# Altium PCB Chocolate_Vending_Machine_V1.0.PcbDoc
Units mm, origin at the board's own origin, x right, y up, seen from the top; angles counter-clockwise.
Board outline 80 x 72 mm, 2 copper layers (Top Layer, Bottom Layer); 17 components, 21 nets, 117 pads, 20 vias.
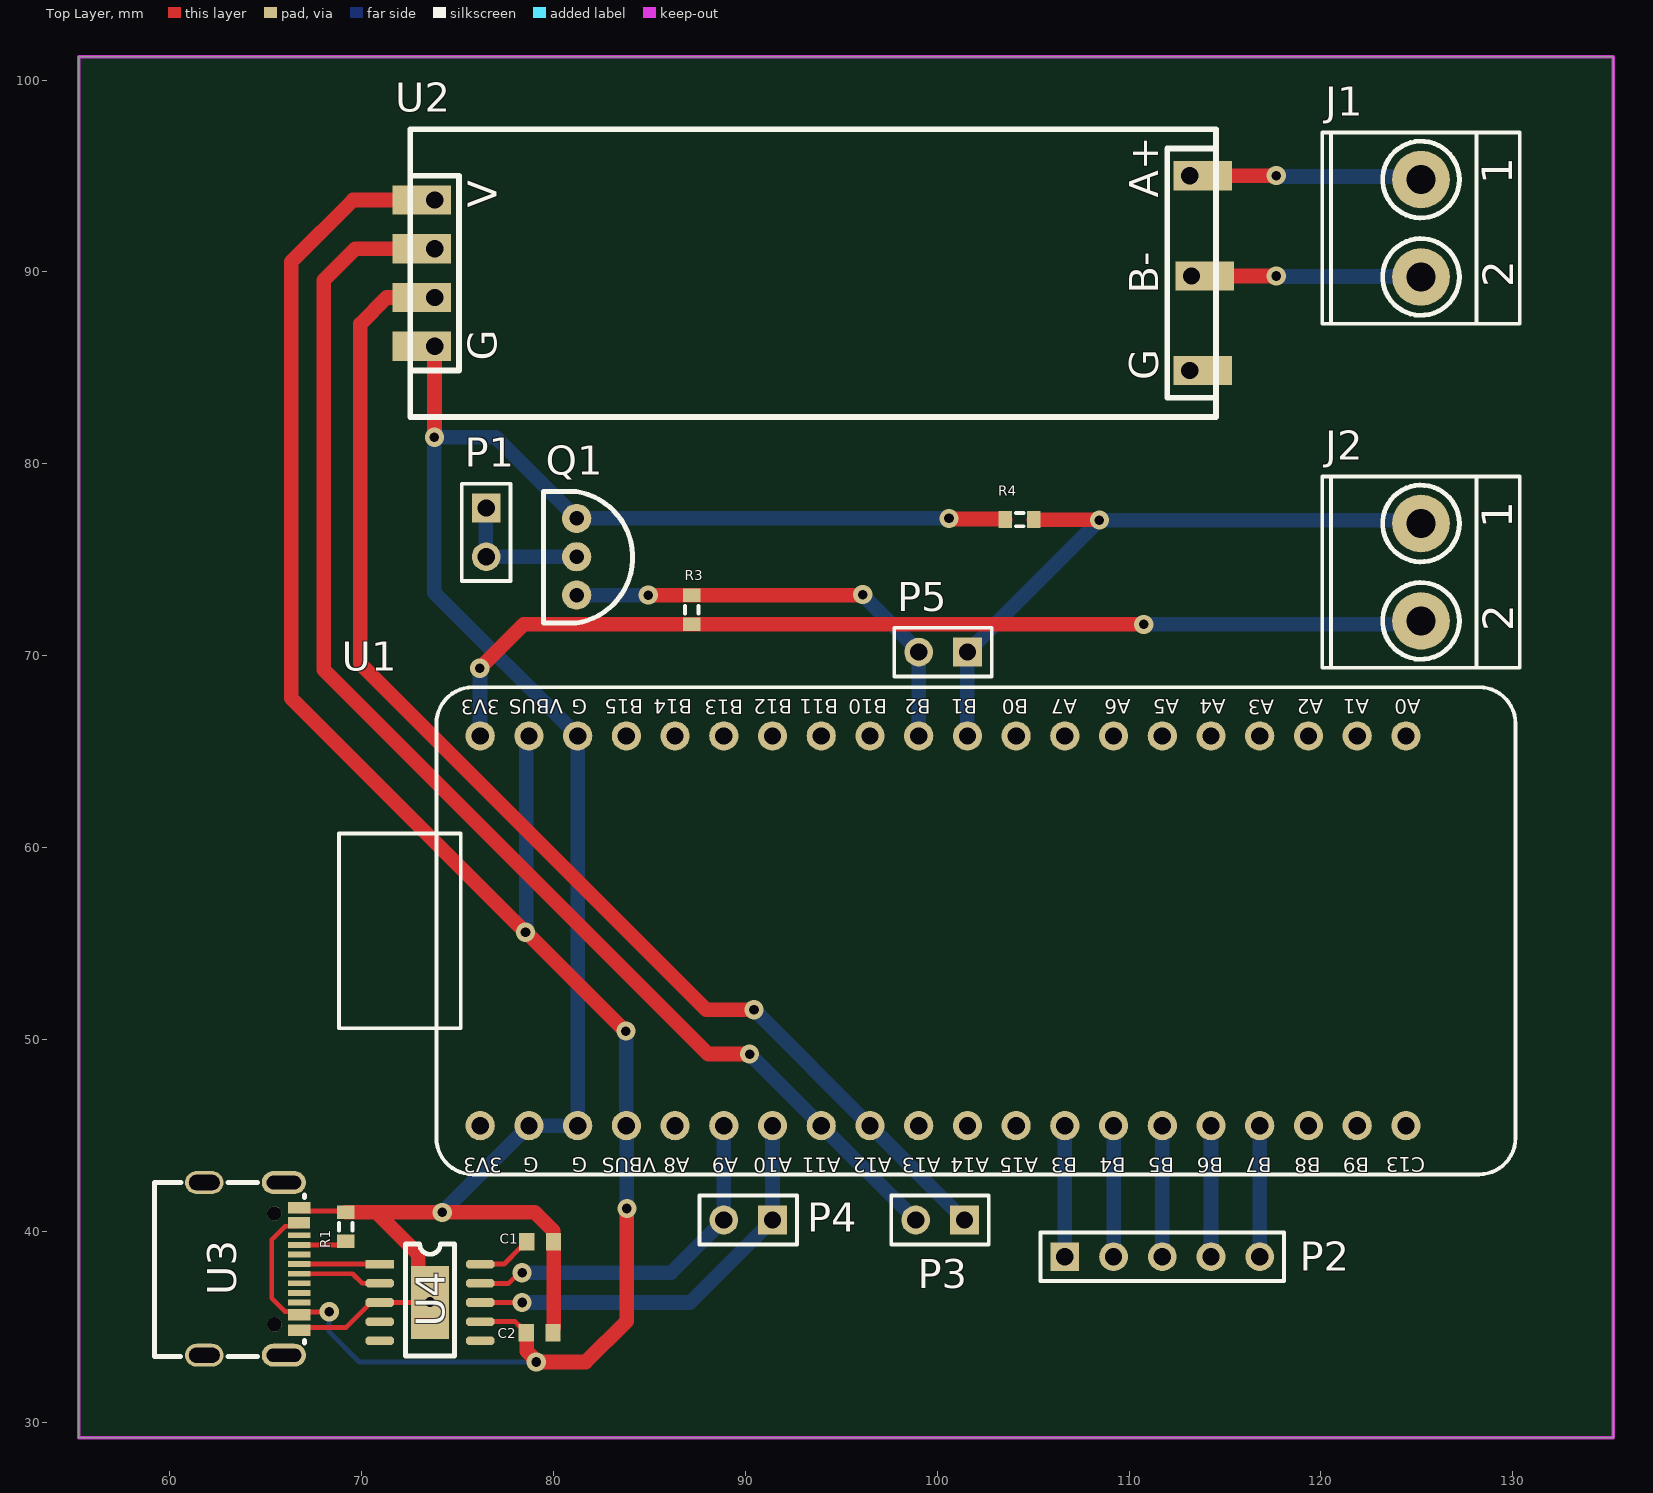
[diagram p0: Top Layer view]
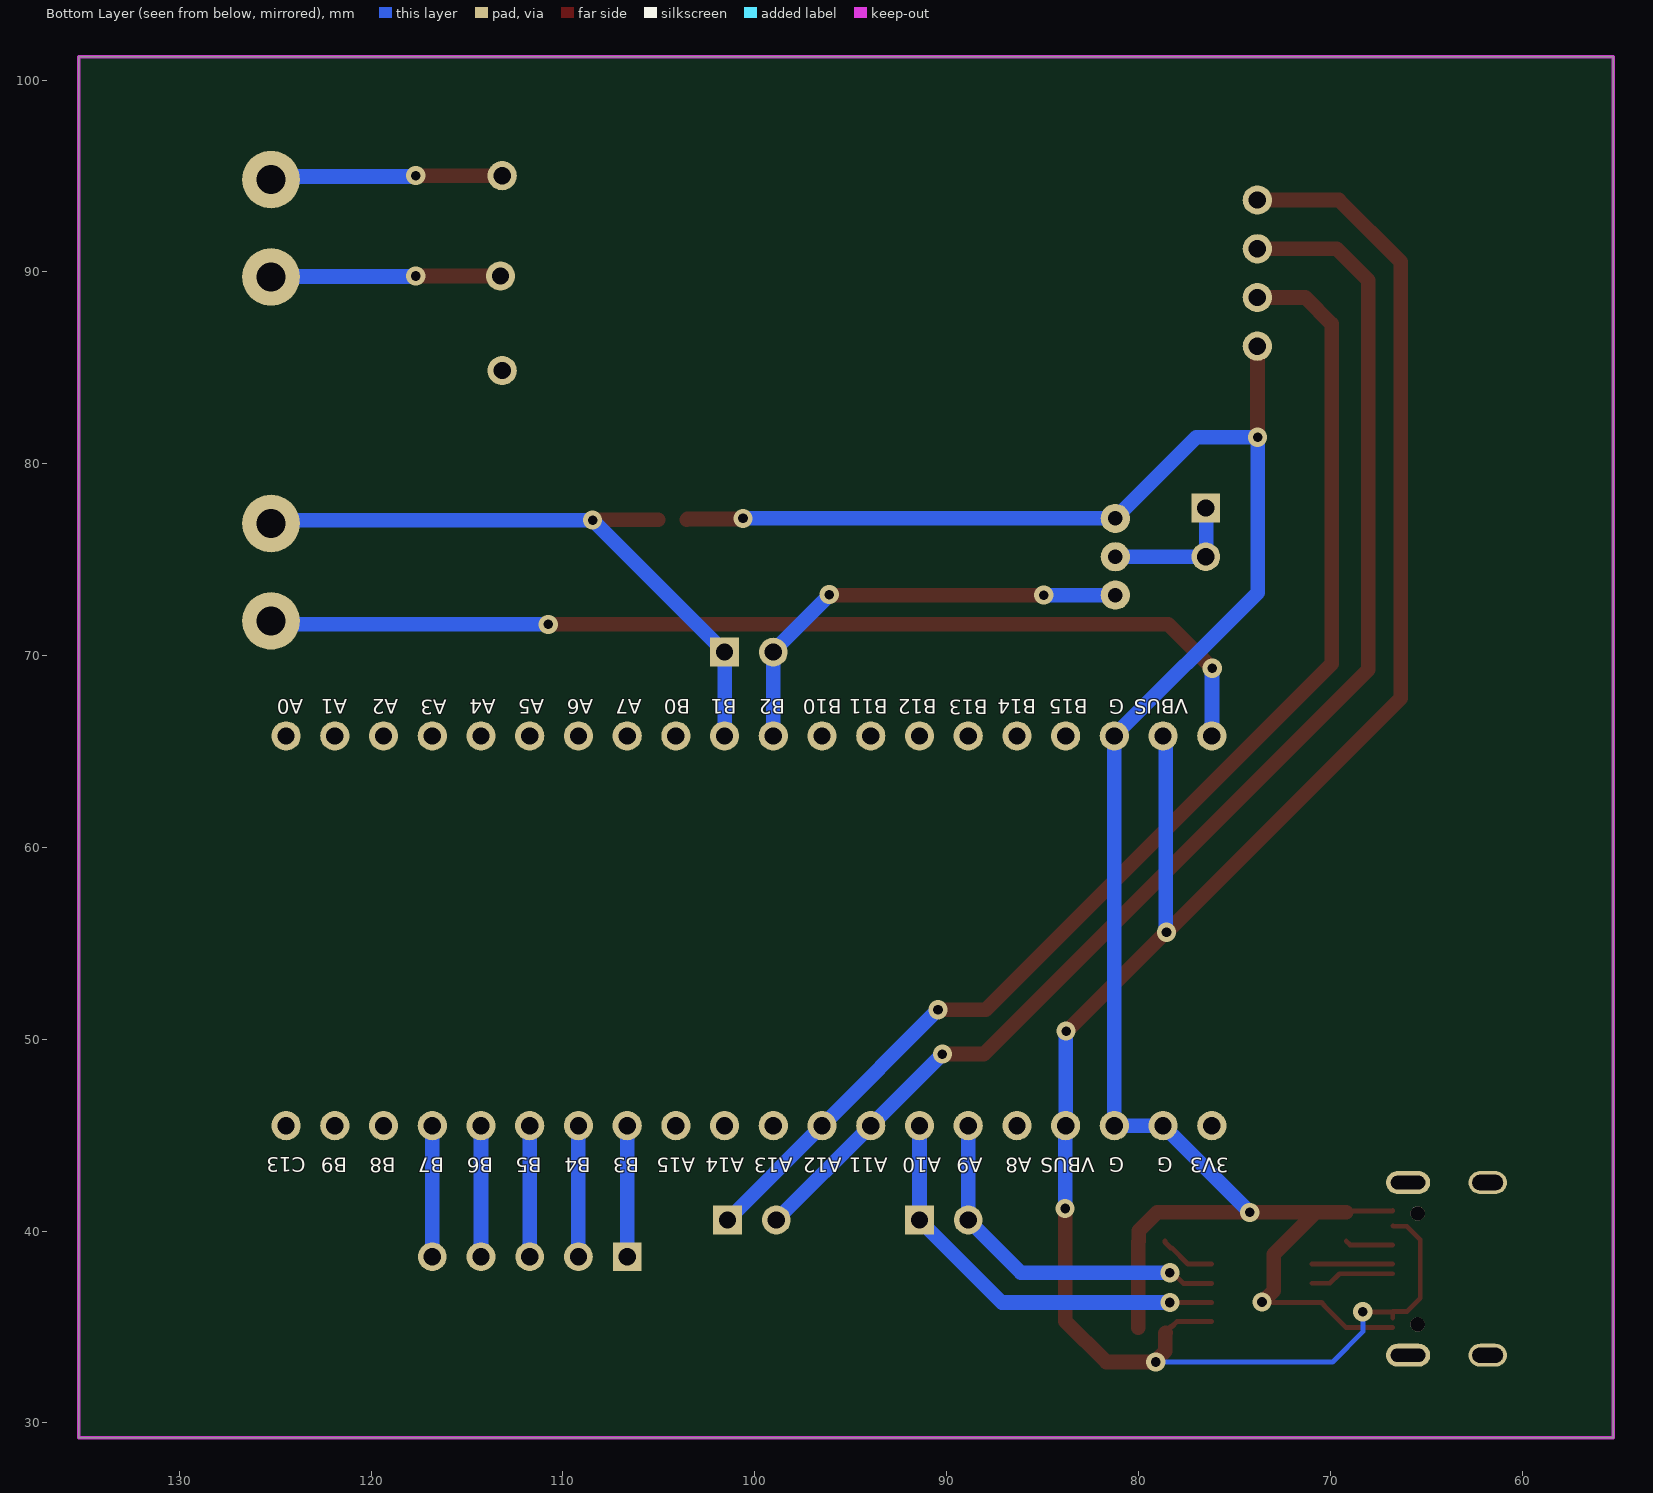
[diagram p1: Bottom Layer view, seen from below]

## Layer stack, top to bottom
Top Solder: solder mask 0.0102, Solder Resist, Dk 3.5
Top Layer: signal copper 0.0356
Dielectric 1: dielectric 0.32, FR-4, Dk 4.8
Bottom Layer: signal copper 0.0356
Bottom Solder: solder mask 0.0102, Solder Resist, Dk 3.5

## Board outline
55.245,29.219 55.245,101.219 135.245,101.219 135.245,29.219

## Design rules (kind name [scope] priority, off if disabled: settings)
Clearance [All] p1: gap=0.102 ignorepadtopadclearanceinfootprint=FALSE except(0: Arc-Hole Track-Hole SMDPad-Hole THPad-Hole Via-Hole Fill-Hole Poly-Hole Region-Hole Text-Hole)
PolygonConnect [All] p1: connectstyle=Relief reliefconductorwidth=0.254 reliefentries=4 polygonreliefangle="90 Angle" airgapwidth=0.254
RoutingVias [All] p1: holewidth=0.5 width=1 viastyle="Through Hole" minholewidth=0.5 minwidth=1 maxholewidth=0.5 maxwidth=1
SolderMaskExpansion [All] p1: expansion=0.102 istentingtop=FALSE
Width [All] p1: maxlimit=0.762 minlimit=0.178 preferedwidth=0.254 minimp=50.000000 maximp=50.000000 favimp=50.000000
30 further rules are at their usual default settings.

## Components (designator, comment, footprint, x,y, rotation, side; value= is the part's Value field where it differs from the comment)
C1 "Cap Semi" 1608[0603] 79.299,39.446 r0 top value=0.1uF
C2 "Cap Semi" 1608[0603] 79.273,34.696 r180 top value=0.1uF
J1 "Terminal_Block" "terminal block" 125.222,89.738 r0 top
J2 "Terminal_Block" "terminal block" 125.222,71.806 r0 top
P1 "Header 2" HDR1X2 76.486,77.692 r270 top
P2 "Header 5" HDR1X5 106.655,38.659 r0 top
P3 "Header 2" HDR1X2 101.417,40.574 r180 top
P4 "Header 2" HDR1X2 91.415,40.574 r180 top
P5 "Header 2" HDR1X2 101.575,70.18 r180 top
Q1 "S9013" S9013 81.202,75.149 r180 top
R1 "Res3" J1-0603 69.164,40.222 r270 top value=5.1K
R3 "Res3" J1-0603 87.198,72.39 r90 top value=1K
R4 "Res3" J1-0603 104.292,77.089 r180 top value=1K
U1 "STM32F411_TYPEC" STM32F411_TypeC 128.245,68.351 r180 top
U2 "UART_TO_485" UART_TO_RS485 114.366,82.428 r90 top
U3 "Type_C" Type_C_V2 63.297,37.846 r270 top
U4 "CH340K" CH340K_V1 73.558,36.274 r0 top

## Footprints (in the part's own frame and the unit in brackets; to place one, negate y for a bottom-side part, rotate by r counter-clockwise, add the part's x,y. Pads: shape width x height; smd on the part's side, far side on the other; paste and mask are expansions set on the pad)
1608[0603] [mm] "Chip Capacitor, Body 1.6x0.8mm, IPC High Density"
  rect 0.8x0.9 smd: 1(-0.7,0) 2(0.7,0)
  body extent -0.87,-0.48 0.87,0.48, height 1.3
CH340K_V1 [mm] "自己畫的"
  rect 2x3.8 smd: 0(0,0)
  rect 1.5x0.45 smd: 1(-2.616,2)
  oct 1.5x0.45 smd: 2(-2.616,1) 3(-2.616,0) 4(-2.616,-1) 5(-2.616,-2) 6(2.616,-2) 7(2.616,-1) 8(2.616,0) 9(2.616,1) 10(2.616,2)
  silkscreen extent -1.27,-2.79 1.27,3.05
HDR1X2 [mm] "Connector; Header; 2 Position"
  rect 1.5x1.5 hole 0.9: 1(0,0)
  round 1.5 hole 0.9: 2(2.54,0)
  silkscreen extent -1.27,-1.27 3.81,1.27
HDR1X5 [mm] "Connector; Header; 5 Position"
  rect 1.5x1.5 hole 0.9: 1(0,0)
  round 1.5 hole 0.9: 2(2.54,0) 3(5.08,0) 4(7.62,0) 5(10.16,0)
  silkscreen extent -1.27,-1.27 11.43,1.27
J1-0603 [mm] "Chip Resistor, Body 1.6x0.8mm, IPC High Density"
  rect 0.7x0.9 smd: 1(-0.75,0) 2(0.75,0)
  silkscreen extent -0.2,-0.35 0.2,0.35, body extent -0.85,-0.48 0.85,0.48, height 0.9
S9013 [mil] "S9013_TO-92"
  round 60 hole 30: 0(-0.08,-78.87) 1(-0.08,-0.13) 2(-0.08,78.61)
  silkscreen extent -115,-134 68,136
STM32F411_TypeC [mil]
  round 60 hole 35.43: 1(2050,100) 2(1950,100) 3(1850,100) 4(1750,100) 5(1650,100) 6(1550,100) 7(1450,100) 8(1350,100) 9(1250,100) 10(1150,100) 11(1050,100) 12(950,100) 13(850,100) 14(750,100) 15(650,100) 16(550,100) 17(450,100) 18(350,100) 19(250,100) 20(150,100) 21(2050,900) 22(1950,900) 23(1850,900) 24(1750,900) 25(1650,900) 26(1550,900) 27(1450,900) 28(1350,900) 29(1250,900) 30(1150,900) 31(1050,900) 32(950,900) 33(850,900) 34(750,900) 35(650,900) 36(550,900) 37(450,900) 38(350,900) 39(250,900) 40(150,900)
  silkscreen extent -75,0 2340,1000
"terminal block" [mm]
  round 3 hole 1.5 paste+0 mask+0.051: 1(0,5.08) 2(0,0)
  silkscreen extent -5.15,-2.44 5.15,7.54
Type_C_V2 [mm] "孟昌學長的"
  oval 1.2x2.3 hole 0.7 slot 1.8 at 90 deg: 0(-4.678,2.644) 0(4.322,2.644)
  oval 1.2x2 hole 0.8 slot 1.6 at 90 deg: 0(-4.678,-1.506) 0(4.322,-1.506)
  rect 0.3x1.15 smd: A1(-3.528,3.442) A4(-2.728,3.44) A5(-1.428,3.444) A6(-0.428,3.444) A7(0.072,3.442) A9(2.372,3.444) A12(3.172,3.444) B1(2.872,3.444) B4(2.072,3.444) B5(1.572,3.444) B6(0.572,3.444) B7(-0.928,3.442) B9(-2.428,3.44) B12(-3.228,3.442)
  rect 0.3x1.148 smd: A8(-1.928,3.444) B8(1.072,3.444)
  round 0.75 hole 0.75 unplated: ""(-3.068,2.144) ""(2.712,2.144)
  silkscreen extent -4.68,-4.11 4.38,3.72, body extent -4.67,-4.06 4.27,3.84, height 3.25
UART_TO_RS485 [mil]
  round 60 hole 35.43: 1(445.71,1597.13) 2(345.71,1597.13) 3(245.71,1597.13) 4(145.71,1597.13) 5(495.71,47.13) 6(289.8,43.58) 7(95.71,47.13)
  rect 60x120 smd: 1(445.71,1623.9) 2(345.71,1623.9) 3(245.71,1623.9) 4(145.71,1623.9) 5(495.71,20.35) 6(289.8,16.81) 7(95.71,20.35)
  silkscreen extent 0,-6 591,1647

## Part data
C1 C2: "Capacitor (Semiconductor SIM Model)", LatestRevisionDate=29-May-2009, LatestRevisionNote="IPC-7351 Footprint Added.", PackageDescription="Chip Capacitor", PackageReference=C1206, Published=8-Jun-2000, Publisher="Altium Limited"
J1 J2: library part "Terminal Block"
P1 P3 P4 P5: "Header, 2-Pin", LatestRevisionDate=17-Jul-2002, LatestRevisionNote="Re-released for DXP Platform.", Publisher="Altium Limited"
P2: "Header, 5-Pin", LatestRevisionDate=17-Jul-2002, LatestRevisionNote="Re-released for DXP Platform.", Publisher="Altium Limited"
R1 R3 R4: "Resistor", LatestRevisionDate=29-May-2009, LatestRevisionNote="IPC-7351 Footprint Added.", PackageDescription="Chip Resistor", PackageReference=J1-0603, Published=8-Jun-2000, Publisher="Altium Limited"

## Via types
v1: diameter 1, hole 0.5, Top Layer to Bottom Layer, 20 vias

## Nets (pads, with @x,y where several pads share a name; then routed paths per layer and width w, separated by ;. In a path a pad name is that pad's centre, name@x,y a point inside that pad or via, vN(x,y) a via of type N, cw(c..) or ccw(c..) an arc to the next point about the centre after c; other vN are vias at no path point)
3.3V: J2.2 R3.1 U1.1 | length 53.6
  Top Layer w0.762: v1(76.149,69.342) 78.447,71.64 R3.1 110.757,71.64 v1(110.769,71.628)
  Bottom Layer w0.762: v1(76.149,69.342) 76.162,69.329 76.162,65.824 U1.1 ; v1(110.769,71.628) 125.044,71.628 J2.2
5V: C2.2 U1.2 U1.24 U2.1 U3.A4 U3.A9 U3.B4 U3.B9 U4.7 | length 112.5
  Top Layer w0.254: U3.B9 66.714,40.251 66.007,40.251 65.303,39.548 65.303,36.5 66.006,35.797 66.718,35.797 U3.B4 ; U3.A9 U3.B4 ; v1(68.301,35.789) 68.293,35.781 66.748,35.781 U3.B4 ; U4.7 77.996,35.274 78.25,35.019 78.3,35.019 78.573,34.746 C2.2
  Top Layer w0.762: U2.1@73.799,93.749 73.119,93.749 69.543,93.749 66.319,90.526 66.319,67.767 78.511,55.575 78.575,55.575 83.731,50.419 v1(83.769,50.419) ; C2.2 78.592,34.677 78.592,33.738 79.096,33.235 v1(79.096,33.172) 81.686,33.172 83.82,35.306 v1(83.82,41.173)
  Bottom Layer w0.254: v1(68.301,35.789) 68.301,34.747 69.875,33.172 v1(79.096,33.172)
  Bottom Layer w0.762: v1(78.537,55.575) 78.582,55.621 78.582,65.679 U1.2 ; v1(83.769,50.419) 83.782,50.406 83.782,45.504 83.807,45.479 83.807,41.186 v1(83.82,41.173)
Bt1_Input: P2.1 U1.33 | length 6.8
  Bottom Layer w0.762: P2.1 U1.33
Bt2_Input: P2.2 U1.34 | length 6.8
  Bottom Layer w0.762: P2.2 U1.34
Bt3_Input: P2.3 U1.35 | length 6.8
  Bottom Layer w0.762: P2.3 U1.35
Bt4_Input: P2.4 U1.36 | length 6.8
  Bottom Layer w0.762: P2.4 U1.36
Bt5_Input: P2.5 U1.37 | length 6.8
  Bottom Layer w0.762: P2.5 U1.37
CH340K_Rx: P4.2 U1.26 U4.9 | length 19
  Top Layer w0.254: U4.9 76.18,37.268 77.666,37.268 78.218,37.821 v1(78.359,37.821)
  Bottom Layer w0.762: v1(78.359,37.821) 86.121,37.821 P4.2 U1.26
CH340K_Tx: P4.1 U1.27 U4.8 | length 21.9
  Top Layer w0.254: U4.8 U4.8 78.358,36.273 v1(78.359,36.271)
  Bottom Layer w0.762: v1(78.359,36.271) 87.112,36.271 P4.1 U1.27
GND: C1.2 C2.1 Q1.0 R1.1 R4.2 U1.3 U1.22 U1.23 U2.4 U3.A1 U3.A12 U3.B1 U3.B12 U4.0 U4.3 | length 116.2
  Top Layer w0.254: U3.B12 66.762,41.051 69.085,41.051 R1.1 ; U3.B1 69.188,34.974 70.319,36.105 70.319,36.138 70.455,36.274 U4.3 U4.0
  Top Layer w0.762: R1.1 70.764,40.972 ; U4.0 72.949,36.883 72.949,38.787 70.764,40.972 ; v1(73.787,81.382) 73.793,81.387 U2.4@73.793,86.123 ; U1.22 U1.22@78.727,45.491 ; C2.1@79.999,34.962 C1.2 79.98,39.465 79.98,40.01 79.018,40.972 v1(74.195,40.972) 70.764,40.972 ; v1(100.616,77.152) 100.648,77.12 103.511,77.12 R4.2
  Bottom Layer w0.762: v1(74.195,40.972) U1.22 U1.23 U1.3 73.787,73.279 v1(73.787,81.382) 76.974,81.382 Q1.0 v1(100.616,77.152)
  other v1: 73.558,36.297
Infrared_Input: P5.2 Q1.2 R3.2 U1.10 | length 23.5
  Top Layer w0.762: v1@84.95,73.14 R3.2 96.076,73.14 v1(96.114,73.177)
  Bottom Layer w0.762: Q1.2 v1(84.938,73.152) ; v1(96.114,73.177) 96.114,73.152 99.035,70.231 U1.10
Infrared_Sensor: P1.1 P1.2 Q1.1 | length 7.3
  Bottom Layer w0.762: P1.2@76.454,75.184 P1.1@76.454,77.724 ; P1.2 Q1.1
NetC1_1: C1.1 U4.10 | length 3
  Top Layer w0.254: U4.10 77.415,38.274 78.265,39.123 78.326,39.123 78.613,39.41 C1.1@78.613,39.472
NetR1_2: R1.2 U3.A5 | length 2.5
  Top Layer w0.254: U3.A5 68.967,39.274 R1.2
PlayBt_Input: J2.1 P5.1 R4.1 U1.11 | length 34.4
  Top Layer w0.762: R4.1 105.055,77.076 108.445,77.076 v1(108.458,77.064)
  Bottom Layer w0.762: U1.11 P5.1 v1(108.458,77.064) 125.044,77.064 J2.1
RS485_A+: J1.1 U2.5 | length 12.1
  Top Layer w0.762: U2.5@113.17,95.02 v1(117.678,95.021) v1(117.678,95.021)
  Bottom Layer w0.762: v1(117.678,95.021) 117.724,94.976 125.064,94.976 J1.1
RS485_B-: J1.2 U2.6 | length 11.3
  Top Layer w0.762: U2.6@113.939,89.789 v1(117.678,89.789)
  Bottom Layer w0.762: v1(117.678,89.789) 117.704,89.764 125.197,89.764 J1.2
RS485_Rx: P3.1 U1.29 U2.3 | length 65.7
  Top Layer w0.762: U2.3@73.799,88.669 73.119,88.669 71.295,88.669 69.912,87.285 69.912,69.585 87.96,51.537 v1(90.449,51.537)
  Bottom Layer w0.762: v1(90.449,51.537) U1.29 ; U1.29@96.5,45.491 P3.1
RS485_Tx: P3.2 U1.28 U2.2 | length 69.5
  Top Layer w0.762: U2.2@73.799,91.209 73.119,91.209 69.67,91.209 68.021,89.56 68.021,69.266 88.062,49.225 v1(90.221,49.225)
  Bottom Layer w0.762: v1(90.221,49.225) U1.28 ; U1.28@93.96,45.491 P3.2
UD+: U3.A6 U4.1 | length 4.2
  Top Layer w0.254: U3.A6 U4.1
UD-: U3.A7 U4.2 | length 4.4
  Top Layer w0.254: U3.A7 69.516,37.774 70.016,37.274 U4.2
pads on no net: U1.4 U1.5 U1.6 U1.7 U1.8 U1.9 U1.12 U1.13 U1.14 U1.15 U1.16 U1.17 U1.18 U1.19 U1.20 U1.21 U1.25 U1.30 U1.31 U1.32 U1.38 U1.39 U1.40 U2.7 U3. U3.0 U3.A8 U3.B5 U3.B6 U3.B7 U3.B8 U4.4 U4.5 U4.6

## Keep-outs
Keep-Out Layer:
  the board outline again, w0.2

## Silkscreen, mask and mechanical layers (free items; w line width, h text height)
Mechanical 1:
  lines w0.2: 55.245,32.131 58.245,32.131 ; 55.245,98.298 58.245,98.298 ; 58.141,32.614 132.258,32.614 ; 58.166,29.21 58.166,32.21 ; 58.166,98.219 58.166,101.219 ; 58.217,97.866 132.334,97.866 ; 58.522,32.08 58.522,98.019 ; 131.877,32.309 131.877,98.247 ; 132.23,32.156 135.23,32.156 ; 132.23,98.273 135.23,98.273 ; 132.309,29.235 132.309,32.235 ; 132.309,98.194 132.309,101.194
  lines w0.254: 55.245,102.489 55.245,102.997 ; 56.769,102.235 55.245,102.743 ; 56.769,103.251 55.245,102.743 ; 88.115,102.743 55.245,102.743 ; 102.385,102.743 135.255,102.743 ; 133.731,102.235 135.255,102.743 ; 133.731,103.251 135.255,102.743 ; 135.255,102.489 135.255,102.997 ; 137.64,30.772 138.148,29.248 ; 137.668,99.695 138.177,101.219 ; 137.894,29.248 138.402,29.248 ; 137.923,101.219 138.431,101.219 ; 138.159,57.464 138.148,29.248 ; 138.165,73.004 138.177,101.219 ; 138.656,30.772 138.148,29.248 ; 138.684,99.695 138.177,101.219
  text "80.01 (mm)" at 88.369,101.829 h1.52
  text "71.971 (mm)" at 139.073,57.717 h1.52 r89.98

## Text inside footprints (layer, text, board x,y; h text height)
J1: Top Overlay "1" at 129.972,94.564 h1.6 r90; Top Overlay "2" at 130.023,89.205 h1.6 r90
J2: Top Overlay "1" at 129.972,76.632 h1.6 r90; Top Overlay "2" at 130.023,71.272 h1.6 r90
U1: Top Overlay "B9" at 122.53,44.083 h1.3 r180; Top Overlay "C13" at 125.451,44.094 h1.3 r180; Top Overlay "B8" at 119.99,44.083 h1.3 r180; Top Overlay "B7" at 117.45,44.08 h1.3 r180; Top Overlay "B3" at 107.29,44.083 h1.3 r180; Top Overlay "B4" at 109.83,44.08 h1.3 r180; Top Overlay "B5" at 112.37,44.08 h1.3 r180; Top Overlay "B6" at 114.91,44.083 h1.3 r180; Top Overlay "A12" at 97.638,44.083 h1.3 r180; Top Overlay "A13" at 100.178,44.083 h1.3 r180; Top Overlay "A14" at 102.718,44.083 h1.3 r180; Top Overlay "A15" at 105.258,44.083 h1.3 r180; Top Overlay "A8" at 87.097,44.083 h1.3 r180; Top Overlay "A9" at 89.637,44.083 h1.3 r180; Top Overlay "A10" at 92.431,44.083 h1.3 r180; Top Overlay "A11" at 94.971,44.083 h1.3 r180; Top Overlay "3V3" at 77.318,44.083 h1.3 r180; Top Overlay "G" at 79.223,44.094 h1.3 r180; Top Overlay "G" at 81.763,44.094 h1.3 r180; Top Overlay "VBUS" at 85.36,44.08 h1.3 r180; Top Overlay "B15" at 84.684,67.972 h1.3 r180; Top Overlay "G" at 81.763,67.972 h1.3 r180; Top Overlay "VBUS" at 80.493,67.985 h1.3 r180; Top Overlay "3V3" at 77.191,67.97 h1.3 r180; Top Overlay "B11" at 94.844,67.985 h1.3 r180; Top Overlay "B12" at 92.431,67.985 h1.3 r180; Top Overlay "B13" at 89.891,67.97 h1.3 r180; Top Overlay "B14" at 87.224,67.985 h1.3 r180; Top Overlay "B0" at 104.75,67.972 h1.3 r180; Top Overlay "B1" at 102.083,67.985 h1.3 r180; Top Overlay "B2" at 99.67,67.985 h1.3 r180; Top Overlay "B10" at 97.384,67.972 h1.3 r180; Top Overlay "A4" at 115.037,67.985 h1.3 r180; Top Overlay "A5" at 112.624,67.972 h1.3 r180; Top Overlay "A6" at 110.084,67.972 h1.3 r180; Top Overlay "A7" at 107.29,67.985 h1.3 r180; Top Overlay "A3" at 117.577,67.97 h1.3 r180; Top Overlay "A2" at 120.117,67.985 h1.3 r180; Top Overlay "A1" at 122.53,67.985 h1.3 r180; Top Overlay "A0" at 125.197,67.972 h1.3 r180; Bottom Overlay "B14" at 85.319,67.985 h1.3 r180; Bottom Overlay "B10" at 95.479,67.972 h1.3 r180; Bottom Overlay "B13" at 87.859,67.97 h1.3 r180; Bottom Overlay "A2" at 118.593,67.985 h1.3 r180; Bottom Overlay "A5" at 110.973,67.972 h1.3 r180; Bottom Overlay "VBUS" at 77.404,67.985 h1.3 r180; Bottom Overlay "G" at 80.747,67.972 h1.3 r180; Bottom Overlay "B15" at 82.652,67.972 h1.3 r180; Bottom Overlay "B12" at 90.526,67.985 h1.3 r180; Bottom Overlay "B11" at 93.066,67.985 h1.3 r180; Bottom Overlay "B2" at 98.4,67.985 h1.3 r180; Bottom Overlay "B1" at 100.94,67.985 h1.3 r180; Bottom Overlay "A7" at 105.893,67.985 h1.3 r180; Bottom Overlay "A6" at 108.433,67.972 h1.3 r180; Bottom Overlay "A3" at 116.053,67.97 h1.3 r180; Bottom Overlay "A1" at 121.26,67.985 h1.3 r180; Bottom Overlay "B0" at 103.353,67.972 h1.3 r180; Bottom Overlay "A4" at 113.513,67.985 h1.3 r180; Bottom Overlay "A0" at 123.546,67.972 h1.3 r180; Bottom Overlay "B9" at 121.26,44.083 h1.3 r180; Bottom Overlay "B5" at 111.1,44.08 h1.3 r180; Bottom Overlay "A14" at 100.559,44.083 h1.3 r180; Bottom Overlay "C13" at 123.419,44.094 h1.3 r180; Bottom Overlay "B8" at 118.72,44.083 h1.3 r180; Bottom Overlay "B7" at 116.18,44.08 h1.3 r180; Bottom Overlay "B3" at 106.02,44.083 h1.3 r180; Bottom Overlay "B4" at 108.56,44.08 h1.3 r180; Bottom Overlay "A13" at 98.019,44.083 h1.3 r180; Bottom Overlay "A15" at 103.099,44.083 h1.3 r180; Bottom Overlay "A12" at 95.479,44.083 h1.3 r180; Bottom Overlay "A10" at 90.272,44.083 h1.3 r180; Bottom Overlay "A11" at 93.066,44.083 h1.3 r180; Bottom Overlay "A8" at 85.573,44.083 h1.3 r180; Bottom Overlay "VBUS" at 82.271,44.08 h1.3 r180; Bottom Overlay "3V3" at 75.286,44.083 h1.3 r180; Bottom Overlay "G" at 78.207,44.094 h1.3 r180; Bottom Overlay "B6" at 113.64,44.083 h1.3 r180; Bottom Overlay "A9" at 88.113,44.083 h1.3 r180; Bottom Overlay "G" at 80.747,44.094 h1.3 r180
U2: Top Overlay "A+" at 111.529,93.859 h1.52 r90; Top Overlay "B-" at 111.529,88.859 h1.52 r90; Top Overlay "G" at 111.529,84.359 h1.52 r90; Top Overlay "V" at 77.029,93.359 h1.52 r90; Top Overlay "G" at 77.029,85.359 h1.52 r90